# Altium PCB PMBV3.PcbDoc
Units mm, origin at the board's own origin, x right, y up, seen from the top; angles counter-clockwise.
Board outline 30 x 65 mm, 2 copper layers (Top Layer, Bottom Layer); 40 components, 13 nets, 83 pads, 150 vias.
Unrouted connection lines stored in the file: 6.
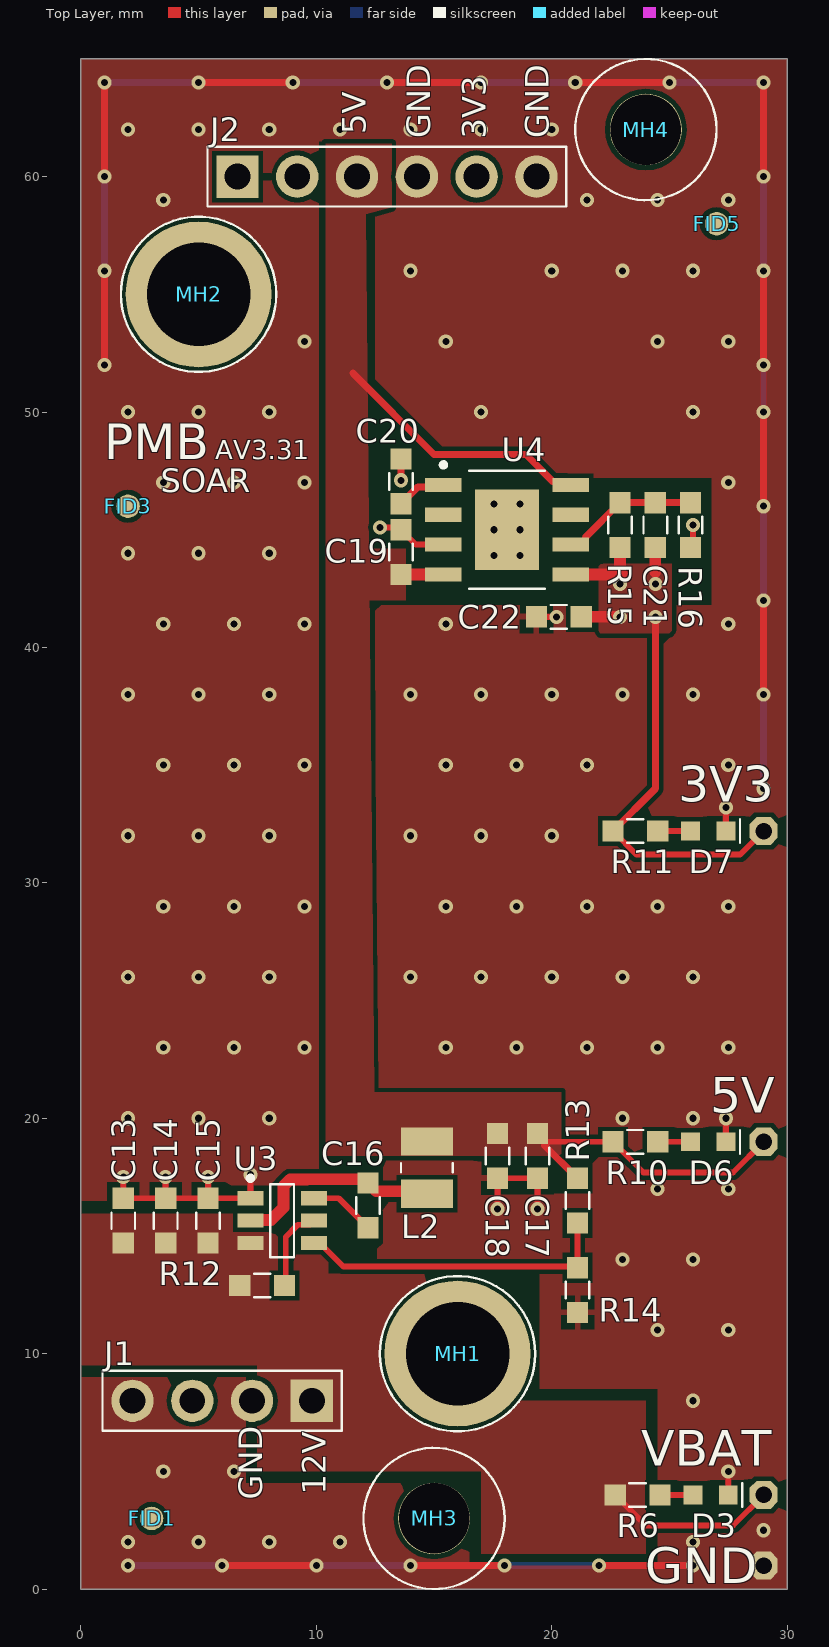
[diagram p0: Top Layer view]
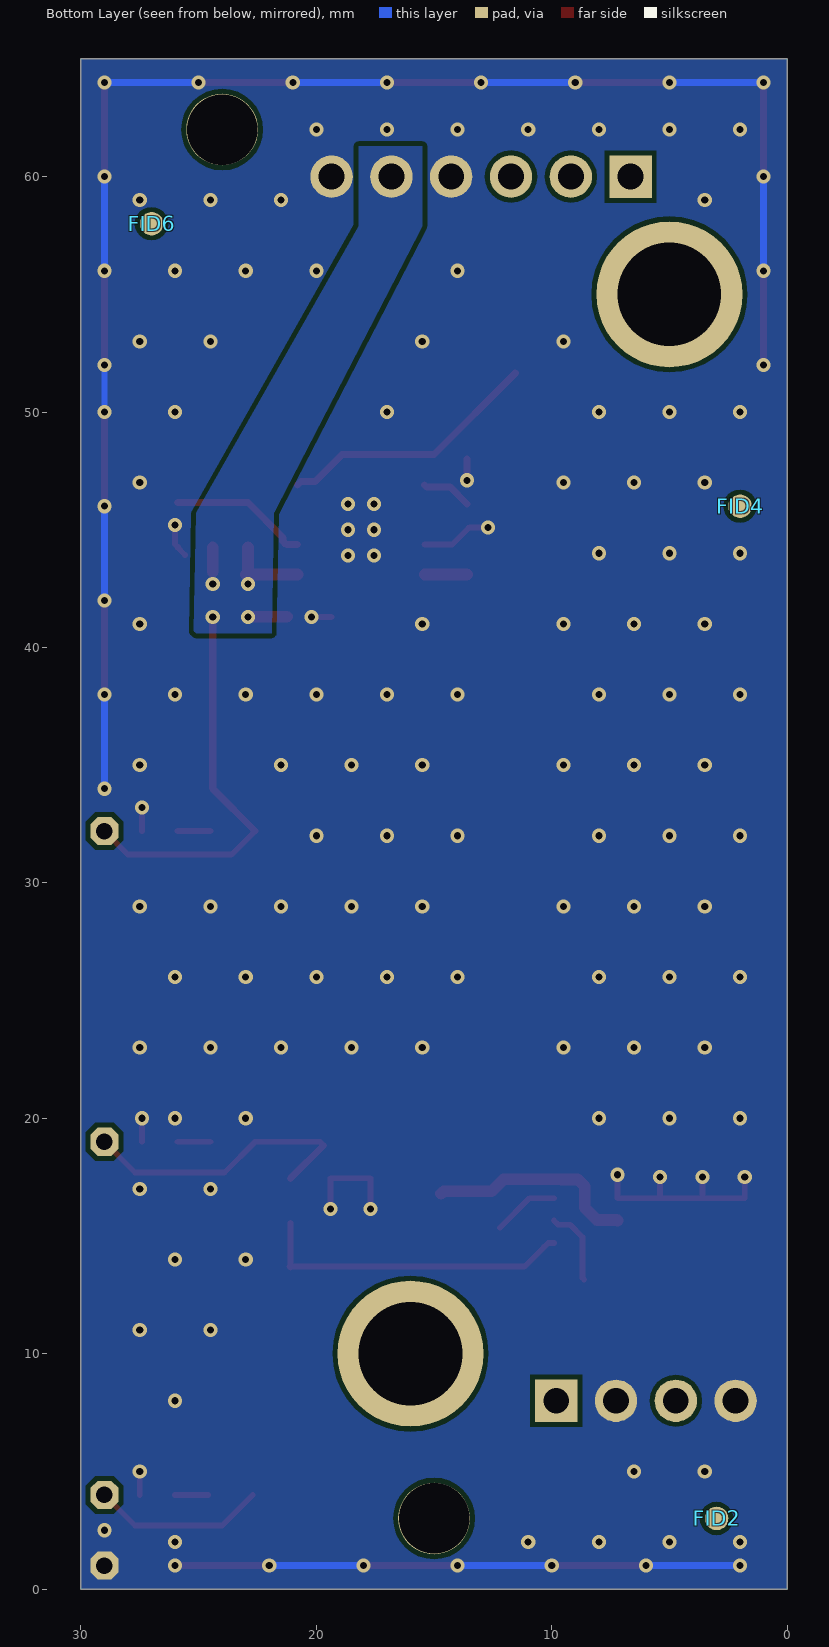
[diagram p1: Bottom Layer view, seen from below]
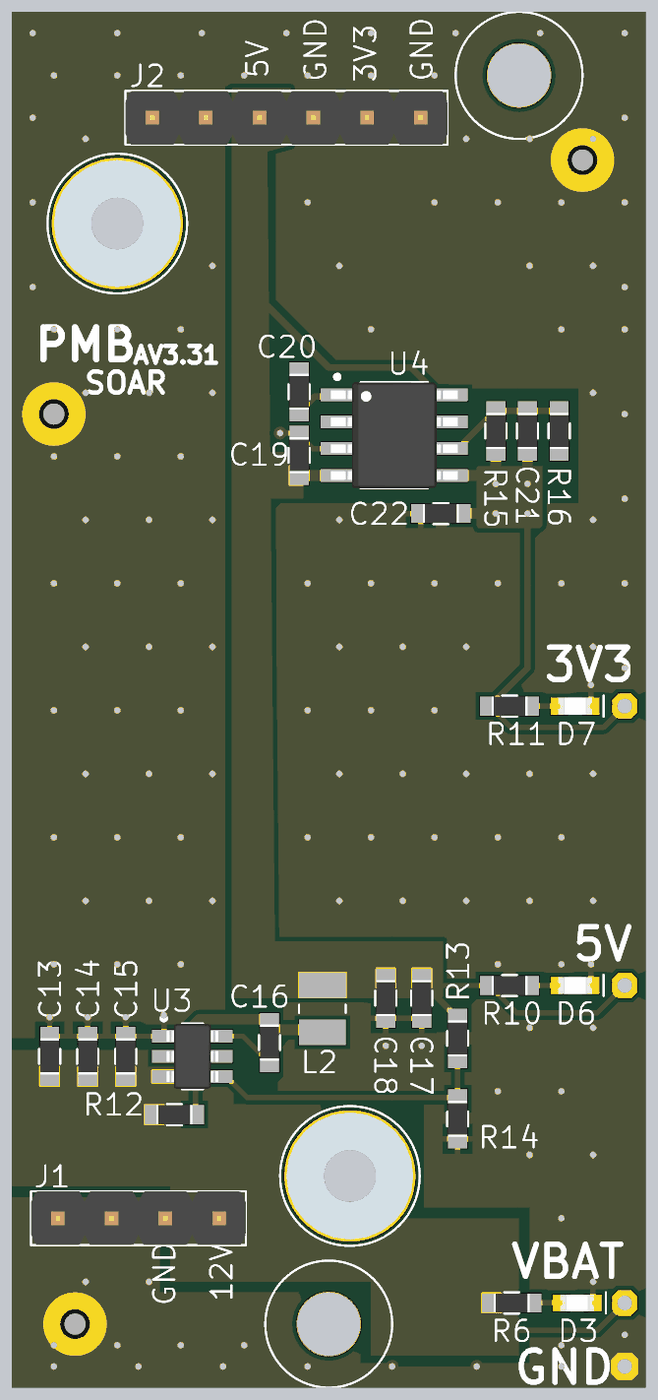
[diagram p2: 3D render of the assembled board from above, using the file's embedded part models]

## Layer stack, top to bottom
Top Solder: solder mask 0.0102, Solder Resist, Dk 3.5
Top Layer: signal copper 0.0356
Dielectric 1: dielectric 0.32, FR-4, Dk 4.8
Bottom Layer: signal copper 0.0356
Bottom Solder: solder mask 0.0102, Solder Resist, Dk 3.5

## Board outline
0,0 30,0 30,65 0,65

## Design rules (kind name [scope] priority, off if disabled: settings)
Clearance [All] p1: gap=0.2 ignorepadtopadclearanceinfootprint=FALSE except(0: Arc-Hole Track-Hole SMDPad-Hole THPad-Hole Via-Hole Fill-Hole Poly-Hole Region-Hole Text-Hole; 0.15: Arc-Arc Arc-Track Track-Track)
DiffPairsRouting [All] p1: maxlimit=0.25 minlimit=0.15 mostfreqgap=0.15 toplayer_minwidth=0.15 toplayer_maxwidth=0.25 toplayer_prefwidth=0.25 bottomlayer_minwidth=0.15 bottomlayer_maxwidth=0.25 bottomlayer_prefwidth=0.25 maxuncoupledlength=12.7
Height [All] p1: minheight=0 maxheight=30 prefheight=12.7
HoleSize [All] p1: absolutevalues=TRUE maxlimit=5 minlimit=0.3 maxpercent=80.000 minpercent=20.000
MinimumSolderMaskSliver [All] p1: minsoldermaskwidth=0.076
PolygonConnect PowerPolygonConnection3V3 [InNet('+3V3')] p1: thpad.connectstyle=Direct thpad.reliefconductorwidth=0.254 thpad.reliefentries=4 thpad.polygonreliefangle="90 Angle" thpad.airgapwidth=0.254 smdpad.connectstyle=Relief smdpad.reliefconductorwidth=0.254 smdpad.reliefentries=4 smdpad.polygonreliefangle="90 Angle" smdpad.airgapwidth=0.254 via.connectstyle=Direct via.reliefconductorwidth=0.254 via.reliefentries=4 via.polygonreliefangle="90 Angle" via.airgapwidth=0.254
PolygonConnect PowerPolygonConnection12V [InNet('+VBAT')] p2: connectstyle=Direct reliefconductorwidth=0.254 reliefentries=4 polygonreliefangle="90 Angle" airgapwidth=0.254
PolygonConnect PowerPolygonConnection5V [InNet('+5V')] p3: connectstyle=Direct reliefconductorwidth=0.254 reliefentries=4 polygonreliefangle="90 Angle" airgapwidth=0.254
PolygonConnect PowerPolygonConnectionGND [InNet('GND')] p4: thpad.connectstyle=Direct thpad.reliefconductorwidth=0.254 thpad.reliefentries=4 thpad.polygonreliefangle="90 Angle" thpad.airgapwidth=0.254 smdpad.connectstyle=Relief smdpad.reliefconductorwidth=0.254 smdpad.reliefentries=4 smdpad.polygonreliefangle="90 Angle" smdpad.airgapwidth=0.254 via.connectstyle=Direct via.reliefconductorwidth=0.254 via.reliefentries=4 via.polygonreliefangle="90 Angle" via.airgapwidth=0.254
PolygonConnect [All] p5: connectstyle=Relief reliefconductorwidth=0.254 reliefentries=4 polygonreliefangle="90 Angle" airgapwidth=0.254
RoutingVias [All] p1: holewidth=0.35 width=0.7 viastyle="Through Hole" minholewidth=0.25 minwidth=0.5 maxholewidth=0.711 maxwidth=1.27
SilkToSilkClearance [All] p1: silktosilkclearance=0.1
SilkToSolderMaskClearance [IsPad] p1: minsilkscreentomaskgap=0.09 clearancetoexposedcopper=TRUE
SolderMaskExpansion SolderMaskExpansion_Vias [IsVia] p1: expansion=0 istentingtop=TRUE
SolderMaskExpansion [All] p2: expansion=0.05 istentingtop=FALSE
Width [All] p1: maxlimit=2 minlimit=0.2 preferedwidth=0.25 minimp=50.000000 maximp=50.000000 favimp=50.000000
24 further rules are at their usual default settings.

## Components (designator, comment, footprint, x,y, rotation, side; value= is the part's Value field where it differs from the comment)
3V3 "Testpoint" Testpoint 29,32.2 r90 top locked
5V "Testpoint" Testpoint 29,19 r0 top locked
C13 "CL10A106MP8NNNC" 0603[1608] 1.8,15.65 r270 top
C14 "CL10A106MP8NNNC" 0603[1608] 3.6,15.65 r270 top
C15 "CGA3E2X7R1E104K080AA" 0603[1608] 5.4,15.65 r270 top
C16 "CGA3E2X7R1E104K080AA" 0603[1608] 12.2,16.3 r90 top
C17 "C1608X5R1A226M080AC" 0603[1608] 19.4,18.4 r90 top
C18 "C1608X5R1A226M080AC" 0603[1608] 17.7,18.4 r90 top
C19 "CL10A475KA8NQNC" 0603[1608] 13.6,44.05 r270 top
C20 "GRM1885C1H103JA01D" 0603[1608] 13.6,47.05 r270 top
C21 "C0603C102K3GACTU" 0603[1608] 24.4,45.2 r270 top
C22 "CL10A106MP8NNNC" 0603[1608] 20.3,41.3 r0 top
D3 "LTST-C191KGKT" LTST-C191KGKT 26.75,4 r180 top
D6 "LTST-C191KGKT" LTST-C191KGKT 26.65,19 r180 top
D7 "LTST-C191KGKT" LTST-C191KGKT 26.65,32.2 r180 top
FID1 "FID_1MM_ROUND_SL" FID_1MM_ROUND_SL 3,3 r0 top
FID2 "FID_1MM_ROUND_SL" FID_1MM_ROUND_SL 3,3 r90 bottom
FID3 "FID_1MM_ROUND_SL" FID_1MM_ROUND_SL 2,46 r90 top
FID4 "FID_1MM_ROUND_SL" FID_1MM_ROUND_SL 2,46 r90 bottom
FID5 "FID_1MM_ROUND_SL" FID_1MM_ROUND_SL 27,58 r90 top
FID6 "FID_1MM_ROUND_SL" FID_1MM_ROUND_SL 27,58 r90 bottom
GND "Testpoint" Testpoint 29,1 r90 top locked
J1 "61300411121" 61300411121 6,8 r180 top locked
J2 "61300611121" 61300611121 13,60 r0 top locked
L2 "DFE252012P-4R7M=P2" DFE252012P-4R7M=P2 14.7,17.9 r90 top value=4.7uH
MH1 "9774110360R" Standoff 16,10 r0 top locked
MH2 "9774110360R" Standoff 5,55 r0 top locked
MH3 "Mounting Hole" MOUNT-HOLE 15,3 r0 top locked
MH4 "Mounting Hole" MOUNT-HOLE 24,62 r0 top locked
R6 "ERA-3AEB2491V" 0603[1608] 23.65,4 r0 top
R10 "ESR03EZPJ751" 0603[1608] 23.55,19 r0 top
R11 "RC1608F331CS" 0603[1608] 23.55,32.2 r0 top
R12 "ERJ-3GEYJ103V" 0603[1608] 7.7,12.9 r180 top
R13 "RC0603FR-0754K9L" 0603[1608] 21.1,16.5 r270 top
R14 "ERJ-3GEYJ103V" 0603[1608] 21.1,12.7 r90 top
R15 "ERJ-3EKF2211V" 0603[1608] 22.9,45.2 r270 top
R16 "RC0603FR-071KL" 0603[1608] 25.9,45.2 r90 top
U3 "TPS562208DDCT" TPS562208DDCT 8.55,15.65 r0 top
U4 "LP3878MRX-ADJ/NOPB" SOIC127P600X170_HS-9N 18.1,45 r0 top
VBAT "Testpoint" Testpoint 29,4 r90 top locked

## Footprints (in the part's own frame and the unit in brackets; to place one, negate y for a bottom-side part, rotate by r counter-clockwise, add the part's x,y. Pads: shape width x height; smd on the part's side, far side on the other; paste and mask are expansions set on the pad)
0603[1608] [mm]
  rect 0.9x0.9 smd mask+0.05: 1(-0.95,0) 2(0.95,0)
  silkscreen extent -0.35,-0.5 0.35,0.5, body extent -0.85,-0.45 0.85,0.45, height 0.55
61300411121 [mm] "CONN HEADER VERT 4POS 2.54MM"
  rect 1.8x1.8 hole 1.1 mask+0.05: 1(-3.81,0)
  round 1.8 hole 1.1 mask+0.05: 2(-1.27,0) 3(1.27,0) 4(3.81,0)
  silkscreen extent -5.08,-1.27 5.08,1.27, body extent -5.08,-1.27 5.08,1.27, height 8.57
61300611121 [mm] "CONN HEADER VERT 6POS 2.54MM"
  rect 1.8x1.8 hole 1.1 mask+0.05: 1(-6.35,0)
  round 1.8 hole 1.1 mask+0.05: 2(-3.81,0) 3(-1.27,0) 4(1.27,0) 5(3.81,0) 6(6.35,0)
  silkscreen extent -7.62,-1.27 7.62,1.27, body extent -7.62,-1.27 7.62,1.27, height 8.57
DFE252012P-4R7M=P2 [mm] "FIXED IND 4.7UH 2A 200 MOHM SMD"
  rect 1.2x2.22 smd: 1(-1.11,0) 2(1.11,0)
  silkscreen extent -0.19,-1.1 0.19,1.1, body extent -1.25,-1 1.25,1, height 1.2
FID_1MM_ROUND_SL [mm] "Fiducial 1MM Round Single Layer"
  round 1 smd mask+1: 0(0,0)
LTST-C191KGKT [mm] "Green 571nm LED Indication - Discrete 2V 0603"
  rect 0.8x0.8 smd paste-3 mask+0.05: 1(-0.75,0) 2(0.75,0)
  silkscreen extent -1.35,-0.5 -1.35,0.5, body extent -0.8,-0.4 0.8,0.4, height 0.8
MOUNT-HOLE [mil] "#4, 0.116in"
  round 120 hole 118 unplated mask+1.97: 0(0,0)
  silkscreen extent -118,-118 118,118
SOIC127P600X170_HS-9N [mm] "SOIC, 8-Leads, Body 4.90x3.90mm, Pitch 1.27mm, Thermal Pad 3.40x2.71mm, IPC Medium Density"
  rect 1.55x0.6 smd: 1(-2.7,1.905) 2(-2.7,0.635) 3(-2.7,-0.635) 4(-2.7,-1.905) 5(2.7,-1.905) 6(2.7,-0.635) 7(2.7,0.635) 8(2.7,1.905)
  rect 2.71x3.4 smd: 9(0,0)
  silkscreen extent -2.8,-2.5 1.6,2.85, body extent -3,-2.5 3,2.5, height 1.7
Standoff [mm] "#4, 0.116in"
  round 6.2 hole 4.4 unplated mask+0.05: 0(0,0)
  silkscreen extent -3.3,-3.3 3.3,3.3, body extent -3,-3 3,3, height 11
Testpoint [mm] "0.7MMD, 1.2MMW, 1.2MML"
  oct 1.2x1.2 hole 0.7 mask+0.05: 1(0,0)
TPS562208DDCT [mm] "IC REG BUCK ADJ 2A TSOT23-6"
  rect 1.1x0.6 smd: 1(-1.35,0.95) 2(-1.35,0) 3(-1.35,-0.95) 4(1.35,-0.95) 5(1.35,0) 6(1.35,0.95)
  silkscreen extent -1.45,-1.55 0.5,1.9, body extent -1.25,-1.52 1.25,1.53, height 1.1

## Part data
3V3 5V GND VBAT: "TESTPOINT 0.7MMD Hole, 1.2MMW, 1.2MML"
C13 C14 C22: "CAP CER 10UF 10V X5R 0603", Capacitance=10µF, Manufacturer="Samsung Electro-Mechanics", Operating Temperature="-55°C ~ 85°C", Package / Case="0603 (1608 Metric)", Supplier Part Number 1=1276-1871-1-ND, Temperature Coefficient=X5R, Tolerance=±20%, Voltage - Rated=10V, ComponentLink1Description=Datasheet, ComponentLink1URL=https://static6.arrow.com/aropdfconversion/f91a1722e2705c3d73cfb1979021b64ae4055093/19-cl10a106mp8nnnc.pdf, Manufacturer Part Number=CL10A106MP8NNNC, Mounting Type="Surface Mount, MLCC", Size / Dimension="0.063\" L x 0.031\" W (1.60mm x 0.80mm)", Supplier 1=Digi-Key, Thickness (Max)="0.035\" (0.90mm)"
C15 C16: "CAP CER 0.1UF 25V X7R 0603", Capacitance=0.1µF, Manufacturer="TDK Corporation", Operating Temperature="-55°C ~ 125°C", Package / Case="0603 (1608 Metric)", Supplier Part Number 1=445-5667-1-ND, Temperature Coefficient=X7R, Tolerance=±10%, Voltage - Rated=25V, ComponentLink1Description=Datasheet, ComponentLink1URL=https://product.tdk.com/info/en/catalog/spec/mlccspec_automotive_general_en.pdf, Manufacturer Part Number=CGA3E2X7R1E104K080AA, Mounting Type="Surface Mount, MLCC", Size / Dimension="0.063\" L x 0.031\" W (1.60mm x 0.80mm)", Supplier 1=Digi-Key, Thickness (Max)="0.035\" (0.90mm)"
C17 C18: "CAP CER 22UF 10V X5R 0603", Capacitance=22uF, Manufacturer="TDK Corporation", Operating Temperature="-55°C ~ 85°C", Package / Case="0603 (1608 Metric)", Supplier Part Number 1=445-9077-1-ND, Temperature Coefficient=X5R, Tolerance=±20%, Voltage - Rated=10V, ComponentLink1Description=Datasheet, ComponentLink1URL=http://datasheets.avx.com/C0GNP0-Dielectric.pdf, Manufacturer Part Number=C1608X5R1A226M080AC, Mounting Type="Surface Mount, MLCC", Size / Dimension="0.063\" L x 0.031\" W (1.60mm x 0.80mm)", Supplier 1=Digi-Key, Thickness (Max)="0.039\" (1.00mm)"
C19: "CAP CER 4.7UF 25V X5R 0603", Capacitance=4.7uF, Manufacturer="Samsung Electro-Mechanics", Operating Temperature="-55°C ~ 85°C", Package / Case="0603 (1608 Metric)", Supplier Part Number 1=1276-1900-1-ND, Temperature Coefficient=X5R, Tolerance=±10%, Voltage - Rated=25V, ComponentLink1Description=Datasheet, ComponentLink1URL=http://www.samsungsem.com/kr/support/product-search/mlcc/__icsFiles/afieldfile/2019/05/10/19-CL10A475KA8NQNC.pdf, Manufacturer Part Number=CL10A475KA8NQNC, Mounting Type="Surface Mount, MLCC", Size / Dimension="0.063\" L x 0.031\" W (1.60mm x 0.80mm)", Supplier 1=Digi-Key, Thickness (Max)="0.035\" (0.90mm)"
C20: "CAP CER 10000PF 50V C0G/NP0 0603", Capacitance=10nF, Manufacturer="Murata Electronics", Operating Temperature="-55°C ~ 125°C", Package / Case="0603 (1608 Metric)", Supplier Part Number 1=490-9666-1-ND, Temperature Coefficient="C0G, NP0", Tolerance=±50%, Voltage - Rated=50V, ComponentLink1Description=Datasheet, ComponentLink1URL=https://www.murata.com/~/media/webrenewal/support/library/catalog/products/capacitor/mlcc/c02e.ashx?la=en-us, Manufacturer Part Number=GRM1885C1H103JA01D, Mounting Type="Surface Mount, MLCC", Size / Dimension="0.063\" L x 0.031\" W (1.60mm x 0.80mm)", Supplier 1=Digi-Key, Thickness (Max)="0.035\" (0.90mm)"
C21: "CAP CER 1000PF 25V C0G/NP0 0603", Capacitance=1000pF, Manufacturer=KEMET, Operating Temperature="-55°C ~ 85°C", Package / Case="0603 (1608 Metric)", Supplier Part Number 1=399-7833-1-ND, Temperature Coefficient="C0G, NP0", Tolerance=±10%, Voltage - Rated=25V, ComponentLink1Description=Datasheet, ComponentLink1URL=https://content.kemet.com/datasheets/KEM_C1003_C0G_SMD.pdf, Manufacturer Part Number=C0603C102K3GACTU, Mounting Type="Surface Mount, MLCC", Size / Dimension="0.063\" L x 0.031\" W (1.60mm x 0.80mm)", Supplier 1=Digi-Key, Thickness (Max)="0.034\" (0.87mm)"
D3 D6 D7: "LED GREEN CLEAR SMD 0603", Colour=Green, Current - Test=20mA, Lens Color=Colourless, Manufacturer="Lite-On Inc.", Millicandela Rating=35mcd, Package / Case="0603 (1608 Metric)", Supplier Part Number 1=160-1446-1-ND, Voltage - Forward (Vf) (Typ)=2V, ComponentLink1Description=Datasheet, ComponentLink1URL=http://optoelectronics.liteon.com/upload/download/DS22-2000-228/LTST-C191KGKT.PDF, Height (Max)=0.65mm, Lens Size="1.10mm x 0.80mm", Lens Style="Rectangle with Flat Top", Lens Transparency=Clear, Manufacturer Part Number=LTST-C191KGKT, Mounting Type="Surface Mount", Size / Dimension="1.60mm L x 0.80mm W", Supplier 1=Digi-Key, Viewing Angle=130°, Wavelength - Dominant=571nm, Wavelength - Peak=574nm
FID1 FID2 FID3 FID4 FID5 FID6: "Fiducial 1mm Round Single Layer"
J1: "CONN HEADER VERT 4POS MALE 2.54MM", Current Rating (Amps)=3A, Insulation Color=Black, Manufacturer="Würth Elektronik", Material Flammability Rating="UL94 V-0", Operating Temperature="-40°C ~ 105°C", Supplier Part Number 1=732-5317-ND, Voltage Rating=250V, ComponentLink1Description=Drawing, ComponentLink1URL=https://www.we-online.de/katalog/datasheet/6130xx11121.pdf, Connector Type=Header, Contact Finish - Mating=Gold, Contact Length - Mating="0.236\" (6.00mm)", Contact Length - Post="0.118\" (3.00mm)", Contact Material="Copper Alloy", Contact Shape=Square, Contact Type="Male Pin", Fastening Type=Push-Pull, Insulation Height="0.100\" (2.54mm)", Insulation Material="Polybutylene Terephthalate (PBT)", Manufacturer Part Number=61300411121, Mounting Type="Through Hole", Number of Positions=4, Number of Rows=1, Overall Contact Length="0.454\" (11.54mm)", Pitch - Mating="0.100\" (2.54mm)", Shrouding=Unshrouded, Style="Board to Board or Cable", Supplier 1=Digi-Key, Termination=Solder
J2: "CONN HEADER VERT 6POS MALE 2.54MM", Current Rating (Amps)=3A, Insulation Color=Black, Manufacturer="Würth Elektronik", Material Flammability Rating="UL94 V-0", Operating Temperature="-40°C ~ 105°C", Supplier Part Number 1=732-5319-ND, Voltage Rating=250V, ComponentLink1Description=Drawing, ComponentLink1URL=https://www.we-online.de/katalog/datasheet/6130xx11121.pdf, Connector Type=Header, Contact Finish - Mating=Gold, Contact Length - Mating="0.236\" (6.00mm)", Contact Length - Post="0.118\" (3.00mm)", Contact Material="Copper Alloy", Contact Shape=Square, Contact Type="Male Pin", Fastening Type=Push-Pull, Insulation Height="0.100\" (2.54mm)", Insulation Material="Polybutylene Terephthalate (PBT)", Manufacturer Part Number=61300611121, Mounting Type="Through Hole", Number of Positions=6, Number of Rows=1, Overall Contact Length="0.454\" (11.54mm)", Pitch - Mating="0.100\" (2.54mm)", Shrouding=Unshrouded, Style="Board to Board or Cable", Supplier 1=Digi-Key, Termination=Solder
L2: "FIXED IND 4.7UH 2A 200 MOHM SMD", Current Rating (Amps)=2A, DC Resistance (DCR)="200mOhm Max", Inductance Frequency - Test=1MHz, Manufacturer="Murata Electronics", Manufacturer Part Number=DFE252012P-4R7M=P2, Operating Temperature="-40C to 125C", Supplier Part Number 1=490-10651-1-ND, Tolerance=+-20%, Height - Seated (Max)="0.047\" (1.20mm)", Material - Core="Iron Powder", Mounting Type="Surface Mount", Series=DFE252012P, Shielding=Shielded, Size/Dimension="0.098\" L x 0.079\" W (2.50mm x 2.00mm)", Supplier 1=Digi-Key, Type=Wirewound
MH1 MH2: "ROUND STANDOFF M3X0.5 STEEL 11MM", Manufacturer="Würth Elektronik", Supplier Part Number 1=732-5278-1-ND, Between Board Height="0.433\" (11.00mm)", ComponentLink1Description=Datasheet, ComponentLink1URL=https://www.keyelco.com/userAssets/file/M65p77.pdf, Diameter - Outside="0.236\" (5.99mm)", Features="Surface Mount", Gender=Female, Length - Overall="0.488\" (12.40mm)", Manufacturer Part Number=9774110360R, Material=Steel, Screw, Thread Size=M3x0.5, Supplier 1=Digi-Key, Threaded/Unthreaded=Threaded, Type="Round Standoff"
MH3 MH4: "#4 Screw, 0.116in Diameter"
R6: "RES SMD 2.49KOHM 0.1% 1/10W 0603", Manufacturer="Panasonic Electronic Components", Operating Temperature="-55°C ~ 155°C", Package="0603 (1608 Metric)", Power  (W)=0.1W, Resistance=2.49K, Supplier Part Number 1=P2.49KDBCT-ND, Temperature Coefficient=±25ppm/°C, Tolerance=±0.1%, ComponentLink1Description=Datasheet, ComponentLink1URL=https://industrial.panasonic.com/cdbs/www-data/pdf/RDM0000/AOA0000C307.pdf, Composition="Thin Film", Manufacturer Part Number=ERA-3AEB2491V, Supplier 1=Digi-Key
R10: "RES SMD 750 OHM 5% 1/4W 0603", Manufacturer="Rohm Semiconductor", Operating Temperature="-55°C ~ 155°C", Package="0603 (1608 Metric)", Power  (W)=0.25W, Resistance=750, Supplier Part Number 1=RHM750DCT-ND, Temperature Coefficient=±200ppm/°C, Tolerance=±5%, ComponentLink1Description=Datasheet, ComponentLink1URL=https://d1d2qsbl8m0m72.cloudfront.net/en/products/databook/datasheet/passive/resistor/chip_resistor/esr-e.pdf, Composition="Thick Film", Manufacturer Part Number=ESR03EZPJ751, Supplier 1=Digi-Key
R11: "RES SMD 330 OHM 1% 1/10W 0603", Manufacturer="Samsung Electro-Mechanics", Operating Temperature="-55°C ~ 155°C", Package="0603 (1608 Metric)", Power  (W)=0.1W, Resistance=330, Supplier Part Number 1=1276-4604-2-ND, Temperature Coefficient=±100ppm/°C, Tolerance=±1%, ComponentLink1Description=Datasheet, ComponentLink1URL=http://www.samsungsem.com/kr/support/product-search/chip-resistor/__icsFiles/afieldfile/2019/01/21/RC_Spec_Sheet(1901).pdf, Composition="Thick Film", Manufacturer Part Number=RC1608F331CS, Supplier 1=Digi-Key
R12 R14: "RES SMD 10K OHM 5% 1/10W 0603", Manufacturer="Panasonic Electronic Components", Operating Temperature="-55°C ~ 155°C", Package="0603 (1608 Metric)", Power  (W)=0.1W, Resistance=10K, Supplier Part Number 1=P10KGCT-ND, Temperature Coefficient=±200ppm/°C, Tolerance=±5%, ComponentLink1Description=Datasheet, ComponentLink1URL=http://www.yageo.com/documents/recent/PYu-RC_Group_51_RoHS_L_9.pdf, Composition="Thick Film", Manufacturer Part Number=ERJ-3GEYJ103V, Supplier 1=Digi-Key
R13: "RES SMD 54.9K OHM 1% 1/10W 0603", Manufacturer=Yageo, Operating Temperature="-55°C ~ 155°C", Package="0603 (1608 Metric)", Power  (W)=0.1W, Resistance=54.9K, Supplier Part Number 1=311-54.9KHRDKR-ND, Temperature Coefficient=±100ppm/°C, Tolerance=±1%, ComponentLink1Description=Datasheet, ComponentLink1URL=https://www.yageo.com/upload/media/product/productsearch/datasheet/rchip/PYu-RC_Group_51_RoHS_L_10.pdf, Composition="Thick Film", Manufacturer Part Number=RC0603FR-0754K9L, Supplier 1=Digi-Key
R15: "RES SMD 2.21K OHM 1% 1/10W 0603", Manufacturer="Panasonic Electronic Components", Manufacturer Part Number=ERJ-3GEYJ103V, Operating Temperature="-55°C ~ 155°C", Package="0603 (1608 Metric)", Power  (W)=0.1W, Resistance=2.21K, Supplier Part Number 1=P10KGCT-ND, Temperature Coefficient=±100ppm/°C, Tolerance=±1%, ComponentLink1Description=Datasheet, ComponentLink1URL=https://industrial.panasonic.com/cdbs/www-data/pdf/RDA0000/AOA0000C304.pdf, Composition="Thick Film", Supplier 1=Digi-Key
R16: "RES SMD 1K OHM 1% 1/10W 0603", Manufacturer=Yageo, Operating Temperature="-55°C ~ 155°C", Package="0603 (1608 Metric)", Power  (W)=0.1W, Resistance=1K, Supplier Part Number 1=311-30.0KHRCT-ND, Temperature Coefficient=±100ppm/°C, Tolerance=±1%, ComponentLink1Description=Datasheet, ComponentLink1URL=https://www.yageo.com/upload/media/product/productsearch/datasheet/rchip/PYu-RC_Group_51_RoHS_L_10.pdf, Composition="Thick Film", Manufacturer Part Number=RC0603FR-071KL, Supplier 1=Digi-Key
U3: "IC REG BUCK ADJ 2A TSOT23-6", Current - Output=2A, Frequency - Switching=580kHz, Manufacturer="Texas Instruments", Operating Temperature="-40°C ~ 125°C (TJ)", Supplier Part Number 1=296-43806-1-ND, Voltage - Input (Max)=17V, Voltage - Input (Min)=4.5V, Voltage - Output (Min/Fixed)=0.768V, ComponentLink1Description=Datasheet, ComponentLink1URL=http://www.ti.com/general/docs/suppproductinfo.tsp?distId=10&gotoUrl=http%3A%2F%2Fwww.ti.com%2Flit%2Fgpn%2Ftps562208, Function=Step-Down, Mounting Type="Surface Mount", Number of Outputs=1, Output Configuration=Positive, Output Type=Adjustable, Packaging="Cut Tape (CT)", Series="D-CAP2™, Eco-Mode™", Supplier 1=Digi-Key, Synchronous Rectifier=Yes, Topology=Buck, Voltage - Output (Max)=17V
U4: "IC REG LIN POS ADJ 800MA 8SO", Base Part Number=LP3878, Current - Output=800mA, Current - Quiescent (Iq)=1.5mA, Current - Supply (Max)=15mA, Manufacturer="Texas Instruments", Operating Temperature="-40°C ~ 125°C", Package / Case="8-PowerSOIC (0.154\", 3.90mm Width)", Supplier Part Number 1=LP3878MRX-ADJ/NOPBTR-ND, Voltage - Input (Max)=16V, Voltage - Output (Max)=5.5V, Voltage - Output (Min/Fixed)=1V, Voltage Dropout (Max)="1.1V @ 800mA", ComponentLink1Description=Datasheet, ComponentLink1URL=http://www.ti.com/lit/ds/symlink/lp3878-adj.pdf, Control Features=Enable, Manufacturer Part Number=LP3878MRX-ADJ/NOPB, Mounting Type="Surface Mount", Number of Regulators=1, Protection Features="Over Current, Over Temperature, Short Circuit", PSRR="60dB (1kHz)", Supplier 1=Digi-Key

## Via types
v1: diameter 0.6, hole 0.3, Top Layer to Bottom Layer, tented both sides, 150 vias

## Nets (pads, with @x,y where several pads share a name; then routed paths per layer and width w, separated by ;. In a path a pad name is that pad's centre, name@x,y a point inside that pad or via, vN(x,y) a via of type N, cw(c..) or ccw(c..) an arc to the next point about the centre after c; other vN are vias at no path point)
+3V3: 3V3.1 C21.2 C22.2 J2.5 R11.1 R15.2 U4.5 | length 23.2
  Top Layer w0.25: R11.1 23.6,31.2 28,31.2 3V3.1
  Top Layer w0.3: R11.1 24.4,34 v1(24.4,41.3) ; 22.9,43.19 22.995,43.095
  Top Layer w0.5: U4.5 22.995,43.095 ; C22.2 v1(22.9,41.3) ; 22.9,43.19 R15.2 ; 24.4,43.2 C21.2
  other v1: 22.9,42.7 24.4,42.7
+5V: 5V.1 C17.2 C18.2 C19.2 J2.3 L2.2 R10.1 R13.1 U4.4 U4.8 | length 25.5
  Top Layer w0.25: 19.7,18.85 19.85,19 R10.1 23.9,17.7 27.7,17.7 5V.1
  Top Layer w0.3: 11.551,51.649 15,48.2 18.899,48.2 20.044,47.055 20.65,47.055 U4.8 ; J2.3@11.7,59.97 J2.3 ; U4.4@15.395,43.1 U4.4 ; 19.7,18.85 R13.1
  Top Layer w0.5: C19.2 U4.4@15.395,43.1
  Bottom Layer w0.3: J2.3@11.7,59.97 J2.3
+VBAT: C13.2 C14.2 C15.2 J1.1 R6.1 R12.2 U3.3 VBAT.1 | length 7.4
  Top Layer w0.25: R6.1 24,2.7 27.7,2.7 VBAT.1
GND: C13.1 C14.1 C15.1 C17.1 C18.1 C19.1 C20.1 C22.1 D3.1 D6.1 D7.1 GND.1 J1.2 J1.4 J2.4 J2.6 R14.1 R16.1 U3.1 U4.3 U4.9 | length 116.6
  Top Layer w0.25: v1(1.8,17.5) C13.1 C14.1 ; v1(3.6,17.5) C14.1 ; v1(5.4,17.5) C15.1 ; v1(7.2,17.6) U3.1 C15.1 ; v1(12.7,45.1) 13.5,45.1 C19.1 14.235,44.365 U4.3 ; v1(17.7,16.15) C18.1 C17.1 v1(19.4,16.15) ; C22.1 v1(20.2,41.3) ; R16.1@25.575,43.925 R16.1 ; R16.1@25.881,44.269 26,44.388 v1(26,45.2) ; D6.1 v1(27.4,20) ; D7.1 v1(27.4,33.2) ; D3.1 v1(27.5,5) ; C14.1 C15.1
  Top Layer w0.3: v1(1,52) v1(1,56) ; v1(1,60) v1(1,64) ; v1(5,64) v1(9,64) ; v1(6,1) v1(10,1) ; v1(13,64) v1(17,64) ; v1(13.6,47.1) C20.1 ; v1(14,1) v1(18,1) ; v1(21,64) v1(25,64) ; v1(22,1) v1(26,1) ; v1(29,38) v1(29,42) ; v1(29,46) v1(29,50) ; v1(29,52) v1(29,56) ; v1(29,60) v1(29,64)
  Bottom Layer w0.25: v1(29,50) v1(29,52)
  Bottom Layer w0.3: v1(1,56) v1(1,60) ; v1(1,64) v1(5,64) ; v1(2,1) v1(6,1) ; v1(9,64) v1(13,64) ; v1(10,1) v1(14,1) ; v1(17,64) v1(21,64) ; v1(18,1) v1(22,1) ; v1(25,64) v1(29,64) ; v1(29,34) v1(29,38) ; v1(29,42) v1(29,46) ; v1(29,56) v1(29,60)
  other v1: 2,2 5,2 8,2 11,2 26,2 29,2.5 3.5,5 6.5,5 26,8 24.5,11 27.5,11 23,14 26,14 24.5,17 27.5,17 2,20 5,20 8,20 23,20 26,20 3.5,23 6.5,23 9.5,23 15.5,23 18.5,23 21.5,23 24.5,23 27.5,23 2,26 5,26 8,26 14,26 17,26 20,26 23,26 26,26 3.5,29 6.5,29 9.5,29 15.5,29 18.5,29 21.5,29 24.5,29 27.5,29 2,32 5,32 8,32 14,32 17,32 20,32 3.5,35 6.5,35 9.5,35 15.5,35 18.5,35 21.5,35 27.5,35 2,38 5,38 8,38 14,38 17,38 20,38 23,38 26,38 3.5,41 6.5,41 9.5,41 15.5,41 27.5,41 17.55,43.9 18.65,43.9 2,44 5,44 8,44 17.55,45 18.65,45 17.55,46.1 18.65,46.1 3.5,47 6.5,47 9.5,47 27.5,47 2,50 5,50 8,50 17,50 26,50 9.5,53 15.5,53 24.5,53 27.5,53 14,56 20,56 23,56 26,56 3.5,59 21.5,59 24.5,59 27.5,59 2,62 5,62 8,62 11,62 14,62 17,62 20,62
NetC16_1: C16.1 U3.6 | length 2.8
  Top Layer w0.25: U3.6 10.95,16.6 C16.1
NetC16_2: C16.2 L2.1 U3.2 | length 9
  Top Layer w0.5: U3.2 7.23,15.68 8.08,15.68 8.6,16.2 8.6,17.107 8.893,17.4 9.6,17.4 9.605,17.405 12.045,17.405 12.55,16.9 14.59,16.9 L2.1
NetC20_2: C20.2 U4.1 | length 2.1
  Top Layer w0.3: C20.2 14.324,46.824 15.319,46.824 U4.1
NetC21_1: C21.1 R15.1 R16.2 U4.6 | length 5.9
  Top Layer w0.3: U4.6 21.275,44.365 21.425,44.515 21.425,44.675 R15.1 C21.1 R16.2
NetD3_2: D3.2 R6.2 | length 1.4
  Top Layer w0.25: R6.2 D3.2
NetD6_2: D6.2 R10.2 | length 1.4
  Top Layer w0.25: R10.2 D6.2
NetD7_2: D7.2 R11.2 | length 1.4
  Top Layer w0.25: R11.2 D7.2
NetR12_1: R12.1 U3.5 | length 3.3
  Top Layer w0.25: R12.1@8.625,13.15 8.7,13.225 8.7,14.958 9.217,15.475 9.725,15.475 U3.5
NetR13_2: R13.2 R14.2 U3.4 | length 13.6
  Top Layer w0.25: U3.4 10.15,14.7 10.325,14.525 11.15,13.7 R14.2@21.1,13.7 ; R13.2 R14.2@21.1,13.7 ; R14.2@21.15,13.7 R14.2 R14.2@21.1,13.7
pads on no net: FID1.0 FID2.0 FID3.0 FID4.0 FID5.0 FID6.0 J1.3 J2.1 J2.2 MH1.0 MH2.0 MH3.0 MH4.0 U4.2 U4.7

## Polygon pours and split planes (outlines as drawn)
GND on Top Layer "NONET_L-01_P-001" (solid, remove dead copper, pour order 20): 12.504,51.396 16.7,47.2 26.8,47.2 26.8,41.796 13.3,41.796 12.504,41.796 12.6,13.6 13.1,13.6 19.5,13.6 19.5,8.5 24.5,8.5 24.5,1 16.5,1 16.5,4.5 7,4.5 7,9 0,9 0,0 30,0 30,65 12.504,65
GND on Top Layer "NONET_L-01_P-001" (solid, remove dead copper, pour order 22): 10.1,61.5 13.651,61.5 13.651,65 12,65 0,65 0,16.5 10.1,16.5
+5V on Top Layer "+5V_L01_P019" (solid, pour order 19): 13.2,61.4 13.2,58.7 12.1,58.4 12.453,21.1 20.4,21.1 20.4,18.5 20.3,18.4 13.2,18.4 10.4,18.4 10.4,61.4
+3V3 on Top Layer "+3V3_L01_P018" (solid, pour order 18): 22.398,43.546 22,43.546 22,40.6 25.1,40.6 25.1,43.546
+5V on Top Layer "+5V_L01_P017" (solid, pour order 17): 11.4,44.2 13.8,44.2 13.8,42 11.4,42
+VBAT on Top Layer "NONET_L-01_P-001" (solid, remove dead copper, pour order 21): 17,1.5 24,1.5 24,8 16.1,8 16.1,13.4 10.5,13.4 10.5,16 10.45,15.95 2.5,15.95 0,15.95 0,9.5 7.5,9.5 7.5,5 17,5
+3V3 on Bottom Layer "+3V3_L02_P016" (solid, pour order 16): 21.9,40.6 25.2,40.6 25.1,45.7 18.2,57.9 18.2,61.3 15.5,61.3 15.5,57.9 21.8,45.7
GND on Bottom Layer "GND_L02_P023" (solid, remove dead copper, pour order 23): 0,65 30,65 30,0 0,0

## Silkscreen, mask and mechanical layers (free items; w line width, h text height)
Top Overlay:
  text "5V" at 12.1,61.8 h1 r90
  text "GND" at 19.874,61.64 h1 r90
  text "GND" at 14.848,61.625 h1 r90
  text "3V3" at 17.2,61.6 h1 r90
  text "PMB" at 1,48 h1.5
  text "AV3.31" at 5.7,48 h0.8
  text "SOAR" at 3.4,46.6 h1
  text "12V" at 10.4,4 h1 r90
  text "GND" at 7.7,3.8 h1 r90
Board Outline:
  the board outline again, w0.1

## Dimensions
0,0 to 0,65 on Dimensions
0,0 to 30,0 on Dimensions